# EAGLE board Rocketv2Backup (EAGLE 8.5.2)
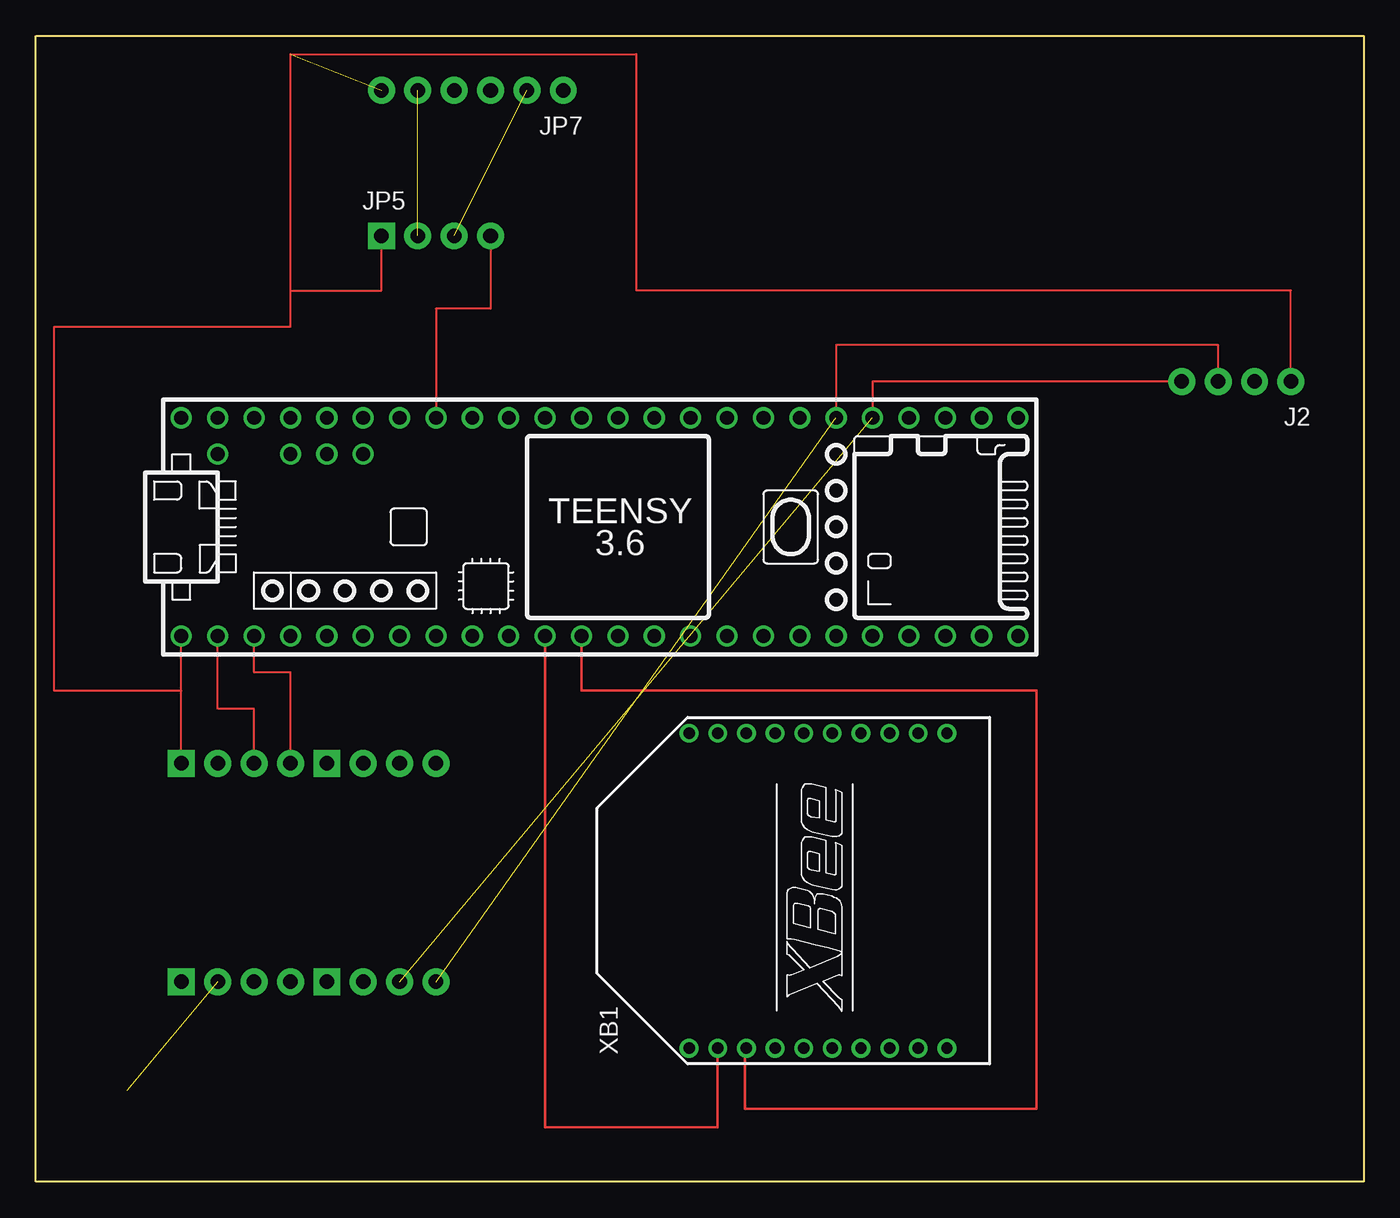
[diagram p0: board, top side]
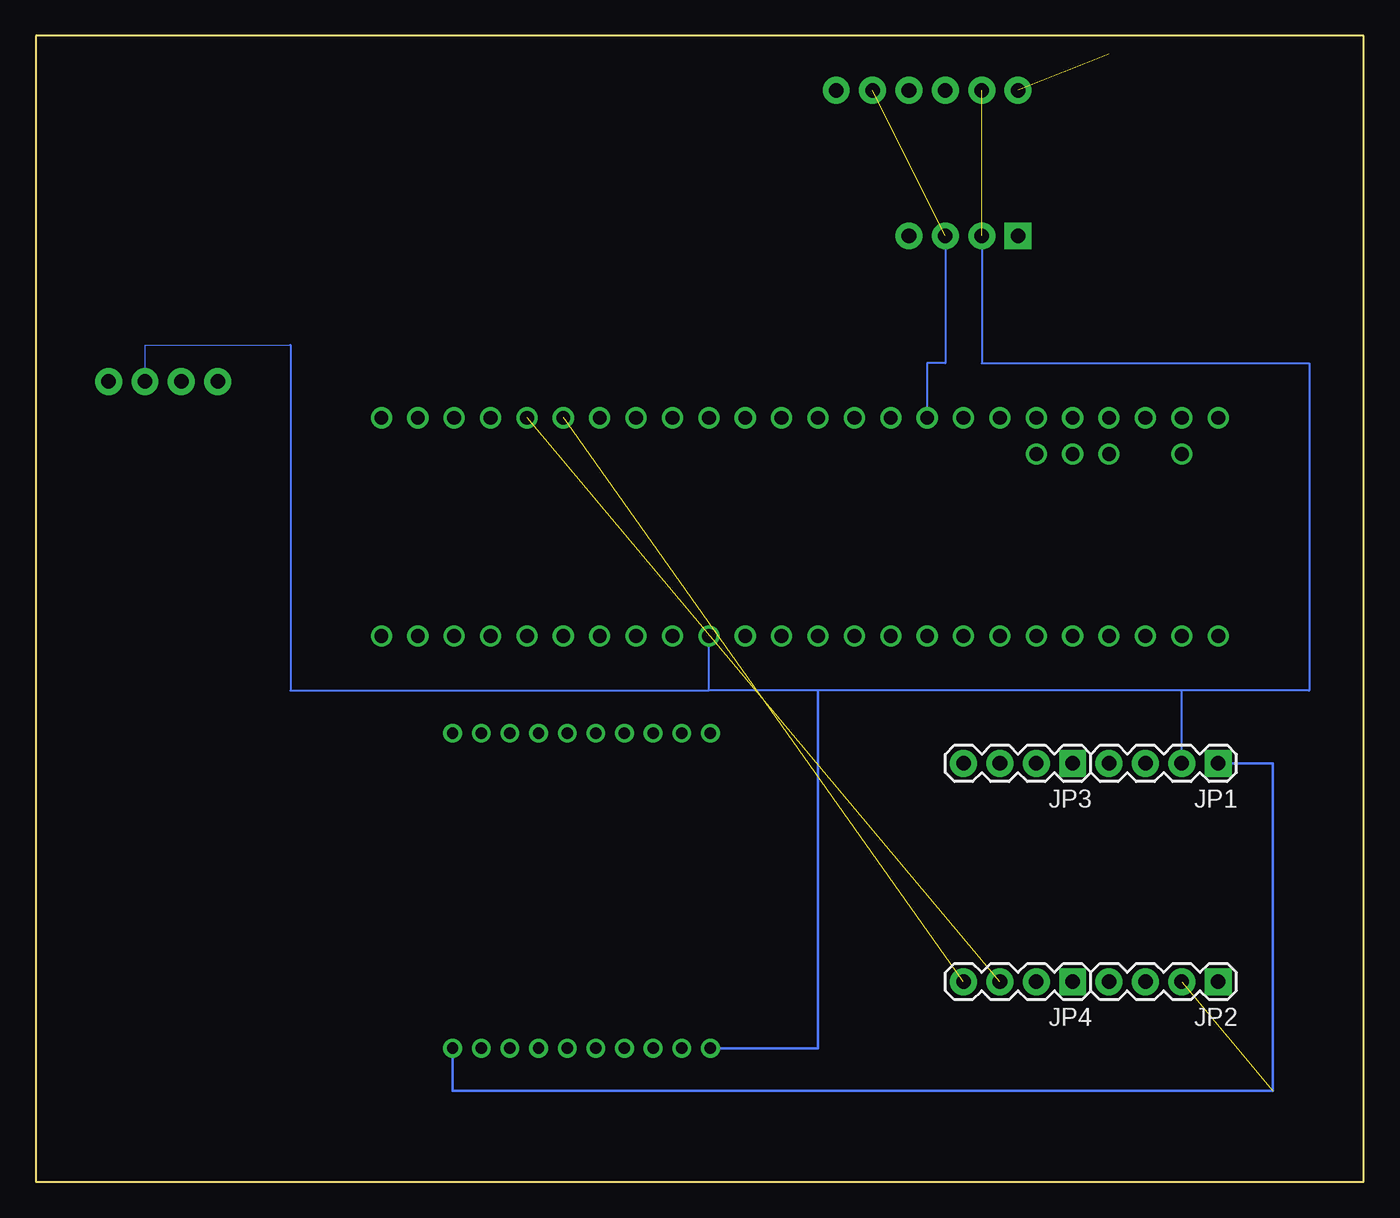
[diagram p1: board, bottom side, seen from below]

Size 92.71 x 80.01 mm. Coordinates in mm from the lower left corner, seen from the top.
Outline: 0,0 0,80.01 92.71,80.01 92.71,0 0,0
Copper layers (1*16): Top 0.035mm / dielectric 1.5mm / Bottom 0.035mm
Design rules "Rocketv1Backup": minimum track width 6mil, minimum drill 0.35mm, track to track 0.205mm, track to pad 0.205mm, pad to pad 0.205mm, via to via 0.205mm, smd to smd 6mil, copper to edge 40mil, drill to drill 6mil, minimum pad ring 10mil, minimum via ring 8mil, stop-mask expansion 4mil, vias tented up to drill 0mil, thermal gap 10mil
Net classes: 1 vcc: width 0.305 mm

## Footprints (pad centres in the part's own frame; a part is rotated, then mirrored left to right if it is on the bottom)
1X04_NO_SILK_ALL_ROUND = drill 1.016 pad 1.88: 1 0,0; 2 2.54,0; 3 5.08,0; 4 7.62,0
1X04 = drill 1.016 pad 1.88 square: 1 0,0 | drill 1.016 pad 1.88: 2 2.54,0; 3 5.08,0; 4 7.62,0
1X04_NO_SILK = drill 1.016 pad 1.88 square: 1 0,0 | drill 1.016 pad 1.88: 2 2.54,0; 3 5.08,0; 4 7.62,0
1X06_NO_SILK = drill 1.016 pad 1.88: 1 0,0; 2 2.54,0; 3 5.08,0; 4 7.62,0; 5 10.16,0; 6 12.7,0
TEENSY_3.5/3.6_BASIC = drill 0.965: 0/RX -25.4,-7.62; 1/TX -22.86,-7.62; 2 -20.32,-7.62; 3/CANTX -17.78,-7.62; 3V3 7.62,-7.62; 3V3_LO -22.86,7.62; 4/CANRX -15.24,-7.62; 5 -12.7,-7.62; 6 -10.16,-7.62; 7 -7.62,-7.62; 8 -5.08,-7.62; 9/CS -2.54,-7.62; 10/CS 0,-7.62; 11/MOSI 2.54,-7.62; 12/MISO 5.08,-7.62; 13/SCK 5.08,7.62; 14/A0 2.54,7.62; 15/A1 0,7.62; 16/A2 -2.54,7.62; 17/A3 -5.08,7.62; 18/A4/SDA -7.62,7.62; 19/A5/SCL -10.16,7.62; 20/A6 -12.7,7.62; 21/A7 -15.24,7.62; 21/DAC0 12.7,7.62; 22/A8 -17.78,7.62; 23/A9 -20.32,7.62; 24 10.16,-7.62; 25 12.7,-7.62; 26 15.24,-7.62; 27 17.78,-7.62; 28 20.32,-7.62; 29 22.86,-7.62; 30 25.4,-7.62; 31/A12 27.94,-7.62; 32/A13 30.48,-7.62; 33/A14 30.48,7.62; 34/A15 27.94,7.62; 35/A16 25.4,7.62; 36/A17 22.86,7.62; 37/A18 20.32,7.62; 38/A19 17.78,7.62; 39/A20 15.24,7.62; A10 -17.78,5.08; A11 -15.24,5.08; A22/DAC1 10.16,7.62; AGND -25.4,7.62; AREF -20.32,5.08; GND -27.94,-7.62; GND2 7.62,7.62; VIN -27.94,7.62; VUSB -25.4,5.08
XBEE = drill 0.8 pad 1.27: 1 -11,9; 2 -11,7; 3 -11,5; 4 -11,3; 5 -11,1; 6 -11,-1; 7 -11,-3; 8 -11,-5; 9 -11,-7; 10 -11,-9; 11 11,-9; 12 11,-7; 13 11,-5; 14 11,-3; 15 11,-1; 16 11,1; 17 11,3; 18 11,5; 19 11,7; 20 11,9

## Placement (x,y rotation side)
FRAME1  FRAME-LETTER  [CREATIVE_COMMONS]  26.67,83.82 90 top  (outside the outline)
FRAME2  FRAME-LETTER  [CREATIVE_COMMONS]  77.47,53.34 90 top
FRAME3  FRAME-LETTER  [CREATIVE_COMMONS]  -5.08,109.22 270 top  (outside the outline)
J2  [1X04_NO_SILK_ALL_ROUND]  87.63,55.88 180 top
JP1  MAIN  [1X04]  10.16,29.21 180 bottom
JP2  MISC  [1X04]  10.16,13.97 180 bottom
JP3  SPI  [1X04]  20.32,29.21 180 bottom
JP4  AUX  [1X04]  20.32,13.97 180 bottom
JP5  [1X04_NO_SILK]  24.13,66.04 0 top
JP7  [1X06_NO_SILK]  36.83,76.2 180 top
U$1  TEENSY_3.5/3.6_BASIC  [TEENSY_3.5/3.6_BASIC]  38.1,45.72 0 top
XB1  XBEE  [XBEE]  54.61,20.32 90 top

## Library data of the parts
FRAME1-FRAME3 = SparkFun-Aesthetics
J2 = SparkFun-Connectors; PROD_ID: CONN-09696
JP1-JP4 = SparkFun
JP5 = SparkFun-Connectors
JP7 = SparkFun-Connectors; PROD_ID: CONN-08437
U$1 = Teensy356
XB1 = maxstream; MPN: XBP24-Z7UIT-004; OC_FARNELL: 1751799; OC_NEWARK: 34R5507

## Nets
3.3V: JP1.2 JP5.2 JP7.5 U$1.3V3 XB1.1
!CS: JP7.1
CLK: JP3.2
CS: JP3.1
GND: J2.1 JP1.1 JP2.2 JP5.1 JP7.6 U$1.GND XB1.10
MISO: JP3.3
MOSI: JP3.4
N$5: JP5.4 U$1.19/A5/SCL
N$6: U$1.10/CS XB1.3
N$7: U$1.9/CS XB1.2
NAV: JP2.3
PPS: JP2.4
RX0: JP1.4 U$1.1/TX
RX1: JP4.1
SCK/SCL: JP7.4
SCL: J2.4 JP4.3
SDA: J2.3 JP4.4
SDI/SDA: JP5.3 JP7.2 U$1.18/A4/SDA
SDO/ADR: JP7.3
TX0: JP1.3 U$1.0/RX
TX1: JP4.2
VBAT: JP2.1
VDD: J2.2

## Tracks (layer width: path | path; a pad name or v marks a point on that pad's centre or on a via)
3.3V  (1 unrouted)
  Bottom 0.152: JP1.2 12.7,34.29 | 12.7,34.29 38.1,34.29 45.72,34.29 | 45.72,34.29 U$1.3V3 | 74.93,58.42 74.93,34.29 45.72,34.29 | 12.7,34.29 3.81,34.29 3.81,57.15 26.67,57.15 JP5.2
  Bottom 0.178: XB1.1 38.1,9.32 38.1,34.29
GND  (2 unrouted)
  Top 0.152: 10.08,29.29 JP1.1 | JP1.1 10.08,29.21 | JP1.1 10.16,34.29 | 10.16,34.29 U$1.GND | 10.16,34.29 1.27,34.29 1.27,59.69 17.78,59.69 17.78,62.23 | J2.1 87.63,62.23 41.91,62.23 41.91,78.74 17.78,78.74 17.78,62.23 | 17.78,62.23 24.13,62.23 JP5.1
  Bottom 0.178: XB1.10 63.61,6.35 6.35,6.35 6.35,29.21 JP1.1
N$5
  Top 0.152: JP5.4 31.75,60.96 27.94,60.96 U$1.19/A5/SCL
N$6
  Top 0.178: U$1.10/CS 38.1,34.29 69.85,34.29 69.85,5.08 49.53,5.08 49.53,9.32 XB1.3
N$7
  Top 0.178: XB1.2 47.61,3.81 35.56,3.81 U$1.9/CS
RX0
  Top 0.152: JP1.4 17.78,35.56 15.24,35.56 U$1.1/TX
SCL  (1 unrouted)
  Top 0.152: 58.42,53.34 58.42,55.88 J2.4
SDA  (1 unrouted)
  Top 0.152: J2.3 82.55,58.42 55.88,58.42 55.88,53.34
SDI/SDA  (1 unrouted)
  Bottom 0.152: JP5.3 29.21,57.15 30.48,57.15 U$1.18/A4/SDA
TX0
  Top 0.152: U$1.0/RX 12.7,33.02 15.24,33.02 JP1.3
VBAT
  Bottom 0.254: JP2.1 10.13,13.99
VDD
  Bottom 0: 74.93,58.42 85.09,58.42 J2.2

## Text on the board
tValues: A. Weiss, M. Grusin | A. Weiss, M. Grusin
Measures: Units in inches | Units are in Inches | Units in inches
Document: 1.150" | 1.150" | 0.150" | 0.150" | 0.050" | 0.050" | 0.000" | 0.000" | 0.700" | 0.650" | 0.476" | 0.050" | 0.000" | 0.000"
tDocu: Marshall Taylor | Note: Top and bottom ground planes must be isolated / no more than 0.008 inch to allow proper grounding. | PCB thickness = 0.032" | Alex Wende | Marshall Taylor | Note: Top and bottom ground planes must be isolated / no more than 0.008 inch to allow proper grounding.